# Altium PCB ZYNQ-HS-DEV-PCB.PcbDoc (part 7 of 10)
Units mm, origin at the board's own origin, x right, y up, seen from the top; angles counter-clockwise.
Board outline 125.25 x 111 mm, 10 copper layers (S1 (SIG), S2 (GND), S3 (SIG), S4 (GND), S5 (PWR), S6 (SIG), S7 (GND), S8 (SIG), S9 (GND), S10 (SIG)), stack 1.597 mm thick; 539 components, 408 nets, 2443 pads, 876 vias.
Unrouted connection lines stored in the file: 1310.
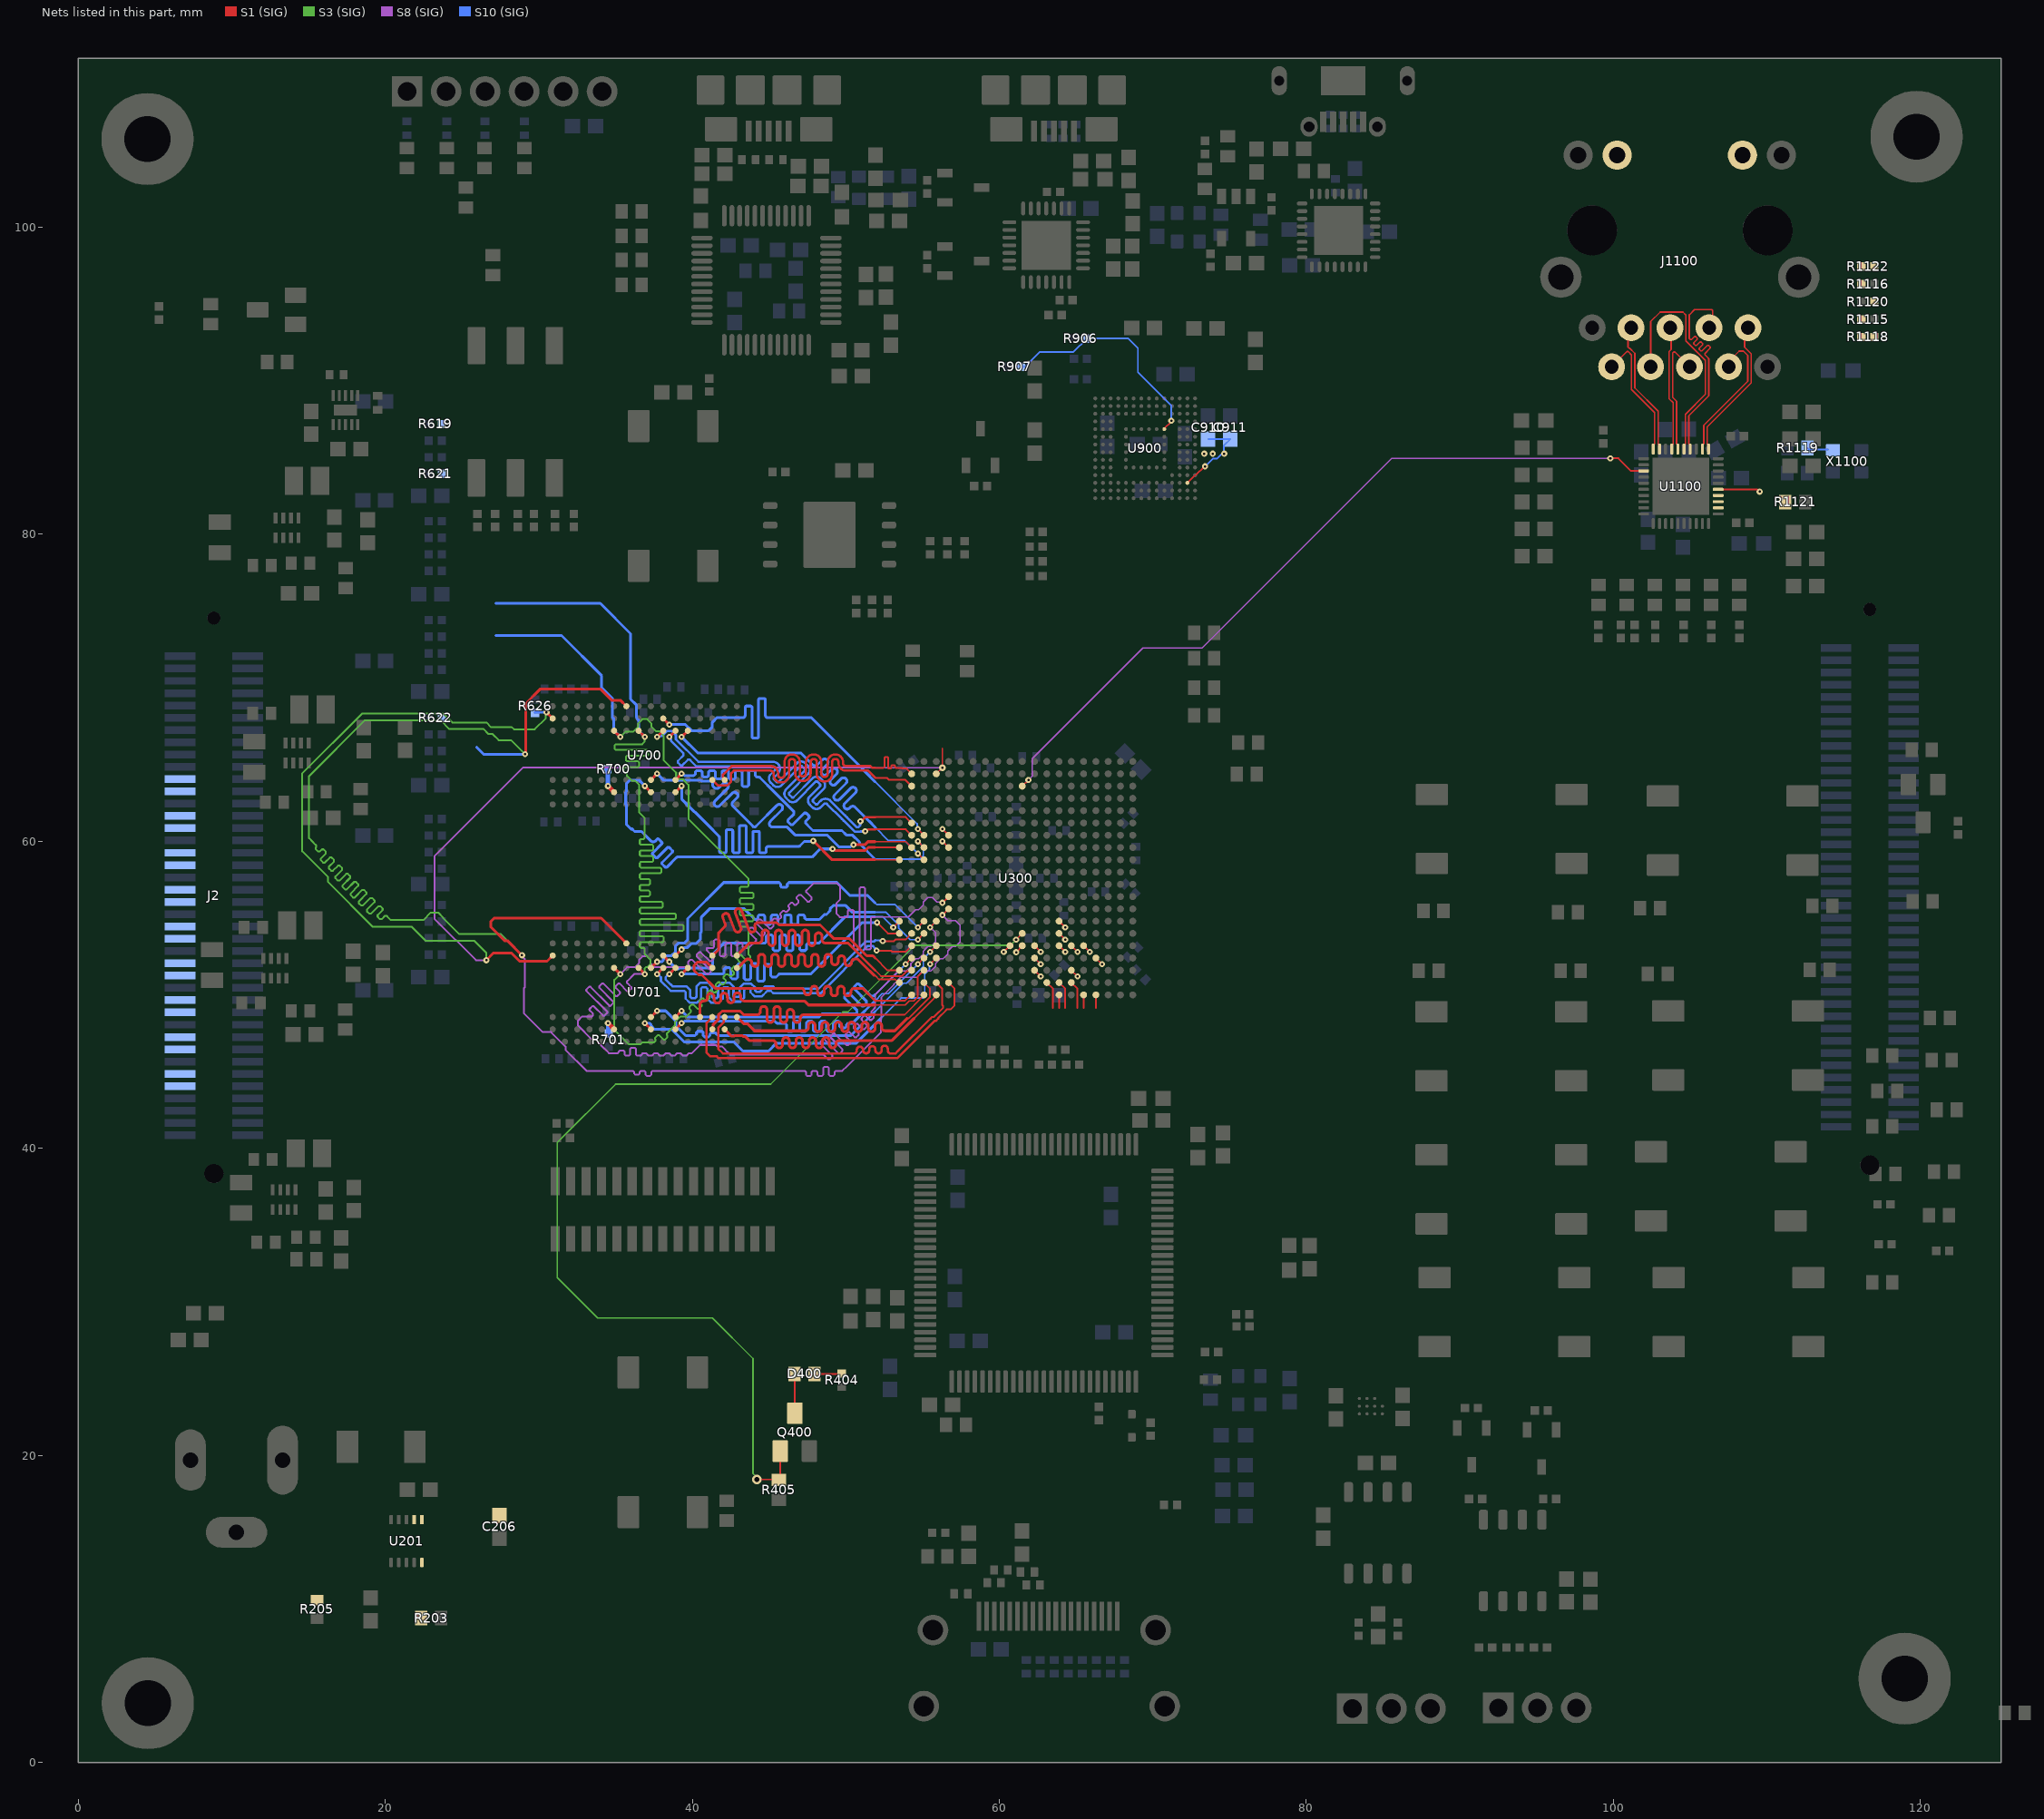
[diagram p11: the nets of this part, all layers, seen from the top]

## Via types
v1: diameter 0.4, hole 0.15, S1 (SIG) to S10 (SIG), tented both sides, 746 vias
v2: diameter 0.5, hole 0.25, S1 (SIG) to S10 (SIG), tented both sides, 108 vias
v3: diameter 0.5, hole 0.2, S1 (SIG) to S10 (SIG), tented both sides, 11 vias
v4: diameter 0.6, hole 0.3, S1 (SIG) to S10 (SIG), tented both sides, 10 vias
v5: diameter 0.45, hole 0.15, S1 (SIG) to S10 (SIG), tented both sides, 1 vias

## Nets (pads, with @x,y where several pads share a name; then routed paths per layer and width w, separated by ;. In a path a pad name is that pad's centre, name@x,y a point inside that pad or via, vN(x,y) a via of type N, cw(c..) or ccw(c..) an arc to the next point about the centre after c; other vN are vias at no path point) (continued)
DDR_DQ10: U300.G3 U700.G2 | length 27.5
  S1 (SIG) w0.11: v1(54.688,60.795) U300.G3@55.088,60.395
  S1 (SIG) w0.18: U700.G2@38.1,68 v1(38.5,67.6)
  S10 (SIG) w0.11: 51.9,63.88 54.646,61.135 54.646,60.837 v1(54.688,60.795)
  S10 (SIG) w0.18: v1(38.5,67.6) 39.548,67.6 39.938,67.21 41.062,67.21 41.3,67.448 41.3,67.752 41.598,68.05 43.175,68.05 43.265,68.05 ccw(c43.265,68.23) 43.445,68.23 43.445,68.723 cw(c43.532,68.723) 43.532,68.81 43.792,68.81 cw(c43.792,68.723) 43.879,68.723 43.879,66.817 ccw(c43.966,66.817) 43.966,66.73 44.226,66.73 ccw(c44.226,66.817) 44.313,66.817 44.313,69.217 cw(c44.4,69.217) 44.4,69.303 44.66,69.303 cw(c44.66,69.217) 44.747,69.217 44.747,68.23 ccw(c44.927,68.23) 44.927,68.05 47.575,68.05 47.75,68.05 51.228,64.572 51.228,64.553 51.9,63.88
DDR_DQ11: U300.H3 U700.F7 | length 27.4
  S1 (SIG) w0.11: v1(54.688,59.995) U300.H3@55.088,59.595
  S1 (SIG) w0.18: U700.F7@38.9,64 v1(39.3,64.4)
  S10 (SIG) w0.11: 51.9,58.84 54.835,58.84 55.043,59.048 55.043,59.64 v1(54.688,59.995)
  S10 (SIG) w0.18: v1(39.3,64.4) 39.36,64.4 39.49,64.27 40,64.27 40.09,64.27 40.195,64.375 40.195,64.523 40.282,64.61 40.543,64.61 40.629,64.523 40.629,64.282 40.716,64.195 40.977,64.195 41.063,64.282 41.063,64.523 41.15,64.61 41.411,64.61 41.497,64.523 41.497,64.15 41.584,64.063 41.845,64.063 41.931,64.15 41.931,64.523 42.018,64.61 42.279,64.61 42.365,64.523 42.365,64.123 42.452,64.036 42.713,64.036 42.799,64.123 42.799,64.523 42.886,64.61 43.147,64.61 43.233,64.523 43.233,63.652 43.32,63.565 43.581,63.565 43.667,63.652 43.667,64.523 43.754,64.61 44.015,64.61 44.101,64.523 44.101,64.28 44.207,64.175 44.375,64.175 44.481,64.069 44.693,63.857 45.023,63.527 45.086,63.464 46.621,61.929 46.621,61.78 46.23,61.389 46.23,61.266 46.414,61.082 46.537,61.082 47.29,61.836 47.413,61.836 47.597,61.652 47.597,61.529 47.384,61.315 47.384,61.166 47.643,60.907 47.707,60.843 47.855,60.695 49.744,60.695 50.024,60.415 50.412,60.415 50.89,59.937 50.89,59.85 51.9,58.84
DDR_DQ12: U300.J3 U700.E3 | length 27.4
  S1 (SIG) w0.11: v1(54.688,59.195) U300.J3@55.088,58.795
  S1 (SIG) w0.18: v1(39.3,66.8) U700.E3@39.7,67.2
  S10 (SIG) w0.11: 51.9,60.923 52.778,60.045 53.837,60.045 v1(54.688,59.195)
  S10 (SIG) w0.18: v1(39.3,66.8) 40.35,65.75 41.348,65.75 46.905,65.75 47.073,65.75 47.777,65.046 47.841,64.982 ccw(c47.994,65.136) 48.148,64.982 48.469,65.303 cw(c48.622,65.15) 48.776,65.303 cw(c48.622,65.15) 48.776,64.997 48.454,64.675 ccw(c48.608,64.522) 48.454,64.369 ccw(c48.608,64.522) 48.761,64.369 49.082,64.69 cw(c49.236,64.536) 49.389,64.69 cw(c49.236,64.536) 49.389,64.383 49.033,64.027 ccw(c49.187,63.873) 49.033,63.72 ccw(c49.187,63.873) 49.34,63.72 49.696,64.076 cw(c49.85,63.922) 50.003,64.076 cw(c49.85,63.922) 50.003,63.769 49.271,63.037 ; 49.271,63.037 ccw(c49.424,62.883) 49.271,62.73 ccw(c49.424,62.883) 49.578,62.73 50.31,63.462 cw(c50.463,63.309) 50.617,63.462 cw(c50.463,63.309) 50.617,63.155 49.931,62.47 ccw(c50.085,62.316) 49.931,62.163 ccw(c50.085,62.316) 50.238,62.163 50.296,62.22 cw(c50.449,62.067) 50.603,62.22 51.46,61.363 51.524,61.299 51.9,60.923
DDR_DQ13: U300.H2 U700.H7 | length 26.6
  S1 (SIG) w0.11: 51.9,59.975 53.908,59.975 U300.H2@54.288,59.595
  S1 (SIG) w0.18: U700.H7@37.3,64 v1(37.7,64.4) ; v1(50.5,59.775) 51.238,59.775 51.438,59.975 51.9,59.975
  S10 (SIG) w0.18: v1(37.7,64.4) 38.11,63.99 40.525,63.99 40.6,63.915 40.642,63.915 41.204,63.915 41.315,63.804 41.315,63.61 41.427,63.498 ccw(c41.58,63.652) 41.733,63.498 41.977,63.742 cw(c42.13,63.588) 42.284,63.742 cw(c42.13,63.588) 42.284,63.435 41.479,62.63 ccw(c41.632,62.476) 41.479,62.323 ccw(c41.632,62.476) 41.786,62.323 42.602,63.139 cw(c42.756,62.986) 42.909,63.139 cw(c42.756,62.986) 42.909,62.833 42.654,62.578 ccw(c42.808,62.424) 42.654,62.271 43.099,61.826 43.163,61.762 43.829,61.096 44,60.925 44.002,60.925 ccw(c44.002,61.142) 44.155,60.989 45.507,62.34 cw(c45.66,62.187) 45.814,62.34 cw(c45.66,62.187) 45.814,62.033 45.076,61.295 ccw(c45.229,61.142) 45.229,60.925 46.175,60.925 46.685,60.415 48.762,60.415 49.542,59.635 50.3,59.635 50.44,59.775 v1(50.5,59.775)
DDR_DQ14: U300.H1 U700.H8 | length 27.8
  S1 (SIG) w0.11: 51.9,59.595 U300.H1@53.488,59.595
  S1 (SIG) w0.18: v1(36.9,63.6) U700.H8@37.3,63.2 ; v1(49.125,59.5) 49.185,59.5 49.3,59.385 51.244,59.385 51.454,59.595 51.9,59.595
  S10 (SIG) w0.18: v1(36.9,63.6) 36.51,63.99 35.938,63.99 35.71,63.762 35.71,63.229 35.66,63.179 35.66,62.421 35.71,62.371 35.71,61.09 36,60.8 36.075,60.8 36.234,60.641 36.691,60.641 36.754,60.577 37.321,60.01 ccw(c37.448,60.138) 37.575,60.01 ; 37.575,60.01 37.696,60.131 cw(c37.758,60.07) 37.819,60.131 38.003,59.947 cw(c37.942,59.886) 38.003,59.824 37.424,59.245 ccw(c37.486,59.184) 37.424,59.123 37.608,58.939 ccw(c37.67,59) 37.731,58.939 38.38,59.587 cw(c38.441,59.526) 38.503,59.587 38.687,59.403 cw(c38.626,59.342) 38.687,59.28 38.038,58.632 ccw(c38.099,58.57) 38.038,58.509 38.222,58.325 ccw(c38.284,58.386) 38.345,58.325 38.944,58.924 cw(c39.07,58.796) 39.057,58.975 39.184,58.975 47.797,58.975 48.322,59.5 v1(49.125,59.5)
DDR_DQ15: U300.J1 U700.F8 | length 27.4
  S1 (SIG) w0.11: 51.9,58.795 U300.J1@53.488,58.795
  S1 (SIG) w0.18: U700.F8@38.9,63.2 v1(39.3,63.6) ; v1(47.875,60.025) 49.105,58.795 51.9,58.795
  S10 (SIG) w0.18: v1(39.3,63.6) 39.3,62.759 41,61.059 41.714,60.345 cw(c41.587,60.217) 41.767,60.217 41.767,59.342 ccw(c41.854,59.342) 41.854,59.255 42.114,59.255 ccw(c42.114,59.342) 42.201,59.342 42.201,60.667 cw(c42.288,60.667) 42.288,60.754 42.548,60.754 cw(c42.548,60.667) 42.635,60.667 42.635,59.342 ccw(c42.722,59.342) 42.722,59.255 42.982,59.255 ccw(c42.982,59.342) 43.069,59.342 43.069,60.939 cw(c43.156,60.939) 43.156,61.026 43.416,61.026 cw(c43.416,60.939) 43.503,60.939 43.503,59.342 ccw(c43.59,59.342) 43.59,59.255 43.85,59.255 ccw(c43.85,59.342) 43.937,59.342 43.937,60.558 cw(c44.024,60.558) 44.024,60.645 44.284,60.645 cw(c44.284,60.558) 44.371,60.558 44.371,59.342 ccw(c44.458,59.342) 44.458,59.255 44.718,59.255 ccw(c44.718,59.342) 44.805,59.342 44.805,59.495 cw(c44.985,59.495) 44.985,59.675 45.075,59.675 46.973,59.675 47.086,59.787 47.288,59.99 47.84,59.99 v1(47.875,60.025)
DDR_DQ16: U300.P1 U701.G2 | length 23.4
  S1 (SIG) w0.11: v1(53.088,54.395) U300.P1@53.488,54.795
  S1 (SIG) w0.18: U701.G2@38.1,52.55 v1(38.5,52.15)
  S10 (SIG) w0.11: 51.9,55.09 52.392,55.09 v1(53.088,54.395)
  S10 (SIG) w0.18: v1(38.5,52.15) 38.95,51.7 39.099,51.7 39.138,51.74 41.09,51.74 41.31,51.96 41.31,52.629 42.041,53.36 44.625,53.36 44.715,53.36 44.82,53.465 44.82,53.806 44.907,53.893 45.168,53.893 45.254,53.806 45.254,52.949 45.341,52.862 45.602,52.862 45.688,52.949 45.688,53.806 45.775,53.893 46.036,53.893 46.122,53.806 46.122,52.949 46.209,52.862 46.47,52.862 46.556,52.949 46.556,53.806 46.643,53.893 46.904,53.893 46.99,53.806 46.99,52.967 47.077,52.88 47.338,52.88 47.424,52.967 47.424,53.255 47.53,53.36 48.175,53.36 48.237,53.36 49.967,55.09 51.9,55.09
DDR_DQ17: U300.P3 U701.H3 | length 22.9
  S1 (SIG) w0.11: v1(54.688,54.395) U300.P3@55.088,54.795
  S1 (SIG) w0.18: U701.H3@37.3,51.75 v1(37.7,52.15)
  S10 (SIG) w0.11: 51.9,55.992 52.016,55.876 53.207,55.876 v1(54.688,54.395)
  S10 (SIG) w0.18: v1(37.7,52.15) 38.005,52.15 38.11,52.256 38.11,52.312 38.348,52.55 38.652,52.55 38.89,52.788 38.89,53.17 39.08,53.36 39.462,53.36 39.69,53.588 39.69,54.965 42.039,57.314 45.117,57.314 45.641,57.314 45.746,57.209 45.746,57.079 45.833,56.992 46.093,56.992 46.18,57.079 46.18,57.209 46.286,57.314 47.875,57.314 49.413,57.314 50.253,56.475 51.417,56.475 51.9,55.992
DDR_DQ18: U300.R3 U701.F2 | length 23.8
  S1 (SIG) w0.11: v1(54.688,53.595) U300.R3@55.088,53.995
  S1 (SIG) w0.18: U701.F2@38.9,52.55 v1(39.3,52.95)
  S10 (SIG) w0.11: 51.9,55.37 52.614,55.37 53.443,54.542 53.443,54.338 54.186,53.595 v1(54.688,53.595)
  S10 (SIG) w0.18: v1(39.3,52.95) 39.36,52.95 39.49,53.08 39.678,53.08 39.938,53.34 40.242,53.34 40.51,53.608 40.51,54.016 40.59,54.096 40.59,55.065 41.15,55.625 43.352,55.625 44.075,54.902 44.165,54.902 44.27,55.007 44.27,55.124 44.357,55.21 44.618,55.21 44.704,55.124 44.704,54.669 44.791,54.582 45.052,54.582 45.138,54.669 45.138,55.124 45.225,55.21 45.486,55.21 45.572,55.124 45.572,54.669 45.659,54.582 45.92,54.582 46.006,54.669 46.006,55.124 46.093,55.21 46.354,55.21 46.44,55.124 46.44,54.669 46.527,54.582 46.788,54.582 46.874,54.669 46.874,55.124 46.961,55.21 47.222,55.21 47.308,55.124 47.308,55.007 47.414,54.902 47.823,54.902 48.27,54.902 48.603,55.235 48.737,55.235 48.965,55.463 48.965,55.597 49.183,55.815 49.983,55.815 50.428,55.37 51.9,55.37
DDR_DQ19: U300.R1 U701.E3 | length 23
  S1 (SIG) w0.11: v1(52.025,54.7) 52.73,53.995 U300.R1@53.488,53.995
  S1 (SIG) w0.18: v1(39.3,51.35) U701.E3@39.7,51.75
  S10 (SIG) w0.11: v1@51.9,54.7 v1(52.025,54.7)
  S10 (SIG) w0.18: v1(39.3,51.35) 41.875,51.35 41.965,51.35 42.07,51.455 42.07,51.673 42.157,51.76 42.418,51.76 42.504,51.673 42.504,51.124 42.591,51.037 42.852,51.037 42.938,51.124 42.938,51.937 43.025,52.024 43.286,52.024 43.372,51.937 43.372,51.07 43.459,50.984 43.72,50.984 43.806,51.07 43.806,51.937 43.893,52.024 44.154,52.024 44.24,51.937 44.24,50.962 44.327,50.875 44.588,50.875 44.674,50.962 44.674,51.892 44.761,51.979 45.022,51.979 45.108,51.892 45.108,51.245 45.195,51.158 45.456,51.158 45.542,51.245 45.648,51.35 47.702,51.35 48.451,52.1 51.052,54.7 v1@51.9,54.7
DDR_DQ20: U300.T4 U701.H7 | length 23
  S1 (SIG) w0.11: v1(55.488,52.795) U300.T4@55.888,53.195
  S1 (SIG) w0.18: U701.H7@37.3,48.55 v1(37.7,48.95)
  S10 (SIG) w0.11: 51.9,48.909 53.741,50.75 53.945,50.75 55.043,51.848 55.043,52.35 v1(55.488,52.795)
  S10 (SIG) w0.18: v1(37.7,48.95) 38.252,48.95 38.91,48.292 38.91,47.988 39.563,47.335 40.075,47.335 40.165,47.335 40.27,47.44 40.27,47.536 40.357,47.622 40.618,47.622 40.704,47.536 40.704,47.335 40.791,47.248 41.052,47.248 41.138,47.335 41.138,47.44 41.225,47.527 41.486,47.527 41.572,47.44 41.678,47.335 42.7,47.335 50.326,47.335 51.9,48.909
DDR_DQ21: U300.U4 U701.H8 | length 23.9
  S1 (SIG) w0.11: v1(55.488,51.995) U300.U4@55.888,52.395
  S1 (SIG) w0.18: v1(36.9,48.15) U701.H8@37.3,47.75
  S10 (SIG) w0.11: 52.275,48.45 53.61,49.785 55.004,49.785 55.133,49.913 55.133,51.342 55.446,51.655 55.446,51.953 v1(55.488,51.995)
  S10 (SIG) w0.18: v1(36.9,48.15) 37.205,48.15 37.31,48.044 37.31,47.988 37.538,47.76 38.642,47.76 39.462,46.94 42.683,46.94 43.288,46.335 44.96,46.335 45.475,46.85 50.675,46.85 52.275,48.45
DDR_DQ22: U300.U2 U701.F7 | length 22.2
  S1 (SIG) w0.11: v1(53.888,51.995) U300.U2@54.288,52.395
  S1 (SIG) w0.18: U701.F7@38.9,48.55 v1(39.3,48.95)
  S10 (SIG) w0.11: 51.9,50.007 v1(53.888,51.995)
  S10 (SIG) w0.18: v1(39.3,48.95) 39.69,48.56 48.267,48.56 48.473,48.766 50.659,48.766 50.723,48.83 50.723,48.979 49.924,49.778 49.924,49.901 50.108,50.085 50.23,50.085 51.043,49.273 51.165,49.273 51.35,49.457 51.35,49.579 50.537,50.392 50.537,50.514 50.722,50.698 50.844,50.698 51.643,49.899 51.792,49.899 51.9,50.007
DDR_DQ23: U300.U3 U701.F8 | length 23.1
  S1 (SIG) w0.11: v1(54.688,51.995) U300.U3@55.088,52.395
  S1 (SIG) w0.18: U701.F8@38.9,47.75 v1(39.3,48.15)
  S10 (SIG) w0.11: 51.9,49.611 52.361,50.072 52.765,50.072 v1(54.688,51.995)
  S10 (SIG) w0.18: v1(39.3,48.15) 39.36,48.15 39.49,48.28 45.373,48.28 45.503,48.15 46.027,48.15 46.132,48.045 46.132,47.702 46.219,47.615 46.479,47.615 46.566,47.702 46.566,48.193 46.653,48.28 46.913,48.28 47,48.193 47,47.702 47.087,47.615 47.347,47.615 47.434,47.702 47.434,48.193 47.521,48.28 47.781,48.28 47.868,48.193 47.868,47.702 47.955,47.615 48.215,47.615 48.302,47.702 48.302,48.193 48.389,48.28 48.649,48.28 48.736,48.193 48.736,47.702 48.823,47.615 49.083,47.615 49.17,47.702 49.17,48.193 49.257,48.28 49.517,48.28 49.604,48.193 49.604,47.937 49.691,47.85 49.951,47.85 50.038,47.937 50.038,48.045 50.143,48.15 50.439,48.15 50.641,48.352 51.9,49.611
DDR_DQ24: U300.V1 U701.C2 | length 19.9
  S1 (SIG) w0.11: 51.9,52.4 52.705,51.595 U300.V1@53.488,51.595
  S1 (SIG) w0.18: U701.C2@41.3,52.55 41.71,52.96 41.71,54.035 41.942,54.267 42.081,54.405 ccw(c41.927,54.559) 42.13,54.636 41.986,55.012 cw(c42.188,55.09) 42.111,55.293 ; 42.111,55.293 cw(c42.188,55.09) 42.391,55.168 42.752,54.224 ccw(c42.955,54.302) 43.033,54.099 ccw(c42.955,54.302) 43.158,54.38 42.796,55.323 cw(c42.999,55.401) 42.921,55.603 cw(c42.999,55.401) 43.201,55.478 43.683,54.222 ccw(c43.886,54.299) 44.088,54.377 44.077,54.405 cw(c44.28,54.483) 44.28,54.7 45.499,54.7 45.649,54.55 48.323,54.55 49.218,53.655 50.243,53.655 51.358,52.54 51.76,52.54 51.9,52.4
DDR_DQ25: U300.Y3 U701.C8 | length 19.9
  S1 (SIG) w0.11: 51.9,48.692 53.819,48.692 55.088,49.96 U300.Y3@55.088,49.995
  S1 (SIG) w0.18: U701.C8@41.3,47.75 41.342,47.792 41.342,48.041 41.69,48.388 41.69,48.692 41.938,48.94 43.111,48.94 43.36,48.692 44.12,48.692 44.21,48.692 ccw(c44.21,48.909) 44.427,48.909 44.427,49.021 cw(c44.644,49.021) 44.861,49.021 44.861,48.411 ccw(c45.078,48.411) 45.295,48.411 45.295,49.021 cw(c45.512,49.021) 45.729,49.021 45.729,48.411 ccw(c45.946,48.411) 46.163,48.411 46.163,48.838 cw(c46.38,48.838) 46.597,48.838 46.597,48.411 ccw(c46.814,48.411) 47.031,48.411 47.031,48.475 cw(c47.248,48.475) 47.248,48.692 47.563,48.692 51.9,48.692
DDR_DQ26: U300.W1 U701.A3 | length 20.1
  S1 (SIG) w0.11: 51.834,51.28 51.87,51.28 51.9,51.249 52.145,51.005 53.205,51.005 53.415,50.795 U300.W1@53.488,50.795
  S1 (SIG) w0.18: U701.A3@42.9,51.75 42.95,51.75 43.225,52.026 43.525,52.325 43.641,52.325 cw(c43.641,52.108) 43.858,52.108 43.858,52.063 ccw(c44.075,52.063) 44.292,52.063 44.292,52.425 cw(c44.509,52.425) 44.726,52.425 44.726,52.063 ccw(c44.943,52.063) 45.16,52.063 45.16,52.425 cw(c45.377,52.425) 45.594,52.425 45.594,52.063 ccw(c45.811,52.063) 46.028,52.063 46.028,52.425 cw(c46.245,52.425) 46.462,52.425 46.462,52.063 ccw(c46.679,52.063) 46.896,52.063 46.896,52.425 cw(c47.113,52.425) 47.33,52.425 47.33,52.063 ccw(c47.547,52.063) 47.764,52.063 47.764,52.425 cw(c47.981,52.425) 48.198,52.425 48.198,52.063 ccw(c48.415,52.063) 48.632,52.063 48.632,52.425 cw(c48.849,52.425) 49.066,52.425 49.066,52.166 ccw(c49.283,52.166) 49.5,52.166 49.5,52.325 cw(c49.717,52.325) 49.934,52.325 49.934,52.108 ccw(c50.151,52.108) 50.368,52.108 cw(c50.585,52.108) 50.585,52.325 50.775,52.325 51.239,51.861 51.82,51.28 51.834,51.28 51.849,51.266 51.88,51.266
DDR_DQ27: U300.Y4 U701.B8 | length 20
  S1 (SIG) w0.11: 54.427,48.45 55.836,49.859 55.836,49.943 U300.Y4@55.888,49.995
  S1 (SIG) w0.18: U701.B8@42.1,47.75 42.55,47.3 42.699,47.3 42.738,47.34 43.258,47.34 43.328,47.271 43.456,47.271 43.702,47.025 44.7,47.025 45.224,47.025 cw(c45.224,46.808) 45.441,46.808 45.441,46.755 ccw(c45.658,46.755) 45.875,46.755 45.875,47.004 cw(c46.092,47.004) 46.309,47.004 46.309,46.755 ccw(c46.526,46.755) 46.743,46.755 46.743,47.004 cw(c46.96,47.004) 47.177,47.004 47.177,46.755 ccw(c47.394,46.755) 47.611,46.755 47.611,47.004 cw(c47.828,47.004) 48.045,47.004 48.045,46.755 ccw(c48.262,46.755) 48.479,46.755 48.479,47.004 cw(c48.696,47.004) 48.913,47.004 48.913,46.755 ccw(c49.13,46.755) 49.347,46.755 49.347,46.808 cw(c49.564,46.808) 49.564,47.025 50.305,47.025 53.002,47.025 54.427,48.45
DDR_DQ28: U300.Y2 U701.C3 | length 20.1
  S1 (SIG) w0.11: 51.9,49.615 53.837,49.615 54.217,49.995 U300.Y2@54.288,49.995
  S1 (SIG) w0.18: U701.C3@41.3,51.75 40.91,52.14 40.338,52.14 40.11,51.912 40.11,51.588 40.398,51.3 40.614,51.3 41.489,50.425 46.049,50.425 47.071,50.425 cw(c47.071,50.208) 47.288,50.208 ccw(c47.505,50.208) 47.722,50.208 47.722,50.344 cw(c47.939,50.344) 48.156,50.344 48.156,50.151 ccw(c48.373,50.151) 48.59,50.151 48.59,50.344 cw(c48.807,50.344) 49.024,50.344 49.024,50.146 ccw(c49.241,50.146) 49.458,50.146 49.458,50.344 cw(c49.675,50.344) 49.892,50.344 49.892,50.146 ccw(c50.109,50.146) 50.326,50.146 50.326,50.208 cw(c50.543,50.208) 50.543,50.425 50.633,50.425 51.09,50.425 51.9,49.615
DDR_DQ29: U300.W3 U701.A7 | length 20.1
  S1 (SIG) w0.11: 53.981,48.45 54.08,48.45 55.468,49.837 55.468,50.415 U300.W3@55.088,50.795
  S1 (SIG) w0.18: U701.A7@42.9,48.55 43.335,48.115 43.587,48.115 44.052,47.65 47.25,47.65 47.34,47.65 ccw(c47.34,47.867) 47.557,47.867 47.557,48.003 cw(c47.774,48.003) 47.991,48.003 47.991,47.81 ccw(c48.208,47.81) 48.425,47.81 48.425,48.003 cw(c48.642,48.003) 48.859,48.003 48.859,47.81 ccw(c49.076,47.81) 49.293,47.81 49.293,48.003 cw(c49.51,48.003) 49.727,48.003 49.727,47.81 ccw(c49.944,47.81) 50.161,47.81 50.161,48.003 cw(c50.378,48.003) 50.595,48.003 50.595,47.81 ccw(c50.812,47.81) 51.029,47.81 51.029,48.003 cw(c51.246,48.003) 51.463,48.003 51.463,47.81 ccw(c51.68,47.81) 51.897,47.81 51.897,47.977 cw(c52.114,47.977) 52.331,47.977 52.331,47.867 ccw(c52.548,47.867) 52.548,47.65 53.181,47.65 53.45,47.919 53.981,48.45
DDR_DQ30: U300.V2 U701.A2 | length 20.4
  S1 (SIG) w0.11: 51.9,51.596 52.281,51.215 53.645,51.215 53.973,51.543 54.236,51.543 U300.V2@54.288,51.595
  S1 (SIG) w0.18: U701.A2@42.9,52.55 43.725,53.375 44.225,53.375 44.315,53.375 ccw(c44.315,53.592) 44.532,53.592 44.532,54.002 cw(c44.749,54.002) 44.966,54.002 44.966,53.416 ccw(c45.183,53.416) 45.4,53.416 45.4,54.002 cw(c45.617,54.002) 45.834,54.002 45.834,53.416 ccw(c46.051,53.416) 46.268,53.416 46.268,54.002 cw(c46.485,54.002) 46.702,54.002 46.702,53.416 ccw(c46.919,53.416) 47.136,53.416 47.136,54.002 cw(c47.353,54.002) 47.57,54.002 47.57,53.416 ccw(c47.787,53.416) 48.004,53.416 48.004,53.822 cw(c48.221,53.822) 48.438,53.822 48.438,53.592 ccw(c48.655,53.592) 48.655,53.375 49.203,53.375 50.121,53.375 51.9,51.596
DDR_DQ31: U300.V3 U701.D7 | length 19.8
  S1 (SIG) w0.11: 51.9,49.335 53.854,49.335 54.119,49.6 54.43,49.6 54.668,49.837 54.668,51.175 U300.V3@55.088,51.595
  S1 (SIG) w0.18: U701.D7@40.5,48.55 40.5,49.45 40.569,49.519 40.65,49.6 40.762,49.6 ccw(c40.762,49.817) 40.978,49.821 40.978,49.87 cw(c41.194,49.874) 41.19,50.091 cw(c41.194,49.874) 41.411,49.878 41.415,49.671 ccw(c41.632,49.675) 41.637,49.458 ccw(c41.632,49.675) 41.849,49.679 41.845,49.887 cw(c42.062,49.891) 42.058,50.108 cw(c42.062,49.891) 42.279,49.895 42.283,49.688 ccw(c42.5,49.692) 42.504,49.475 ccw(c42.5,49.692) 42.717,49.696 42.713,49.904 cw(c42.93,49.908) 42.926,50.125 cw(c42.93,49.908) 43.147,49.912 43.149,49.813 ccw(c43.366,49.817) 43.366,49.6 43.824,49.6 47.3,49.6 47.565,49.335 51.9,49.335
DDR_DQS0_N: U300.B2 U700.B7 | length 21.4
  S1 (SIG) w0.121: 51.9,64.78 52.403,64.78 ccw(c52.403,64.901) 52.524,64.901 52.524,65.431 cw(c52.568,65.431) 52.568,65.475 52.701,65.475 cw(c52.701,65.431) 52.745,65.431 52.745,64.805 ccw(c52.789,64.805) 52.789,64.761 52.922,64.761 ccw(c52.922,64.805) 52.966,64.805 52.966,64.906 cw(c53.01,64.906) 53.01,64.95 53.143,64.95 cw(c53.143,64.906) 53.187,64.906 53.187,64.901 ccw(c53.308,64.901) 53.308,64.78 53.529,64.78 53.647,64.78 53.678,64.75 53.932,64.75 U300.B2@54.288,64.395
  S1 (SIG) w0.15: U700.B7@42.1,64 42.1,64.068 41.987,64.181 41.987,64.337 42.55,64.9 42.751,64.9 45.088,64.9 cw(c45.088,64.398) 45.59,64.398 45.59,64.333 ccw(c45.792,64.333) 45.994,64.333 45.994,65.158 cw(c46.496,65.158) 46.998,65.158 46.998,64.427 ccw(c47.2,64.427) 47.402,64.427 47.402,65.158 cw(c47.904,65.158) 48.406,65.158 48.406,64.392 ccw(c48.608,64.392) 48.81,64.392 48.81,65.158 cw(c49.312,65.158) 49.814,65.158 49.814,65.102 ccw(c50.016,65.102) 50.016,64.9 51.41,64.9 51.595,64.9 51.714,64.78 51.9,64.78
DDR_DQS0_P: U300.C2 U700.C7 | length 21
  S1 (SIG) w0.121: 51.9,64.15 51.925,64.125 52.69,64.125 52.806,64.009 53.873,64.009 U300.C2@54.288,63.595
  S1 (SIG) w0.15: U700.C7@41.3,64 41.675,63.625 42.255,63.625 42.525,63.895 42.525,64.424 42.701,64.6 42.751,64.6 45.088,64.6 cw(c45.088,64.398) 45.29,64.398 45.29,64.333 ccw(c45.792,64.333) 46.294,64.333 46.294,65.158 cw(c46.496,65.158) 46.698,65.158 46.698,64.427 ccw(c47.2,64.427) 47.702,64.427 47.702,65.158 cw(c47.904,65.158) 48.106,65.158 48.106,64.392 ccw(c48.608,64.392) 49.11,64.392 49.11,65.158 cw(c49.312,65.158) 49.514,65.158 49.514,65.102 ccw(c50.016,65.102) 50.016,64.6 51.41,64.6 51.45,64.6 51.9,64.15
DDR_DQS1_N: U300.F2 U700.G3 | length 28.8
  S1 (SIG) w0.121: 51.9,61.58 53.902,61.58 U300.F2@54.288,61.195
  S1 (SIG) w0.15: v1(50.95,61.3) 50.99,61.3 51.271,61.58 51.9,61.58
  S1 (SIG) w0.18: v1(37.7,66.8) U700.G3@38.1,67.2
  S10 (SIG) w0.15: v1(37.7,66.8) 37.748,66.848 38.018,66.848 38.345,67.175 38.655,67.175 38.925,66.905 38.925,66.645 40.395,65.175 44.65,65.175 45.253,65.175 cw(c45.253,64.725) 45.571,64.407 45.314,64.15 ccw(c45.371,64.092) 45.314,64.035 45.485,63.864 ccw(c45.542,63.921) 45.599,63.864 46.867,65.131 46.875,65.131 cw(c47.092,64.818) 47.361,65.087 47.533,64.916 cw(c47.263,64.646) 47.533,64.377 46.31,63.155 ccw(c46.366,63.097) 46.309,63.04 46.481,62.868 ccw(c46.538,62.925) 46.595,62.868 47.862,64.135 47.871,64.135 cw(c48.087,63.822) 48.357,64.091 48.528,63.92 cw(c48.259,63.651) 48.528,63.382 47.859,62.712 ccw(c47.916,62.655) 47.859,62.598 48.03,62.426 ccw(c48.087,62.484) 48.144,62.426 48.354,62.636 cw(c48.672,62.317) 48.939,62.68 48.946,62.68 49.558,62.068 49.953,61.673 50.068,61.558 50.699,60.927 50.823,60.927 50.922,61.027 50.922,61.272 v1(50.95,61.3)
DDR_DQS1_P: U300.G2 U700.F3 | length 28.6
  S1 (SIG) w0.121: 51.9,60.78 53.902,60.78 U300.G2@54.288,60.395
  S1 (SIG) w0.15: v1(51.25,60.65) 51.318,60.65 51.448,60.78 51.9,60.78
  S1 (SIG) w0.18: v1(38.5,66.8) U700.F3@38.9,67.2
  S10 (SIG) w0.15: v1(38.5,66.8) 38.5,66.732 38.625,66.607 38.625,66.52 38.87,66.275 39.423,65.722 39.423,65.598 39.058,65.233 39.058,65.119 39.229,64.947 39.343,64.947 39.709,65.313 39.833,65.313 39.886,65.259 40.27,64.875 44.35,64.875 45.253,64.875 cw(c45.253,64.725) 45.359,64.619 45.058,64.318 45.058,64.309 ccw(c45.371,64.092) 45.102,63.822 45.273,63.652 ccw(c45.542,63.921) 45.812,63.652 47.034,64.874 ; 47.035,64.875 cw(c47.092,64.818) 47.149,64.875 47.32,64.704 cw(c47.263,64.646) 47.32,64.589 46.053,63.322 46.053,63.313 ccw(c46.366,63.097) 46.098,62.827 46.268,62.657 ccw(c46.538,62.925) 46.807,62.656 48.03,63.879 ; 48.03,63.879 cw(c48.087,63.822) 48.145,63.879 48.316,63.708 cw(c48.259,63.651) 48.316,63.594 47.647,62.924 ccw(c47.916,62.655) 47.647,62.385 47.817,62.215 ccw(c48.087,62.484) 48.356,62.214 48.566,62.423 cw(c48.672,62.317) 48.778,62.423 49.741,61.461 49.856,61.345 50.574,60.627 50.947,60.627 50.96,60.639 51.239,60.639 v1(51.25,60.65)
DDR_DQS2_N: U300.T2 U701.G3 | length 24.2
  S1 (SIG) w0.11: 53.888,52.795 U300.T2@54.288,53.195
  S1 (SIG) w0.121: v1(52,52.875) 52.941,52.875 53.022,52.795 53.888,52.795
  S1 (SIG) w0.18: v1(37.7,51.35) U701.G3@38.1,51.75
  S10 (SIG) w0.121: v1@51.9,52.975 v1(52,52.875)
  S10 (SIG) w0.15: v1(37.7,51.35) 37.737,51.35 37.95,51.137 37.95,50.889 38.589,50.25 38.607,50.25 39.474,50.25 39.562,50.162 39.562,49.748 39.818,49.492 40.309,49.492 40.566,49.748 40.566,50.405 40.646,50.486 40.889,50.486 40.97,50.405 40.97,49.748 41.226,49.492 41.717,49.492 41.974,49.748 41.974,50.405 42.054,50.486 42.297,50.486 42.378,50.405 42.378,49.814 42.634,49.558 43.125,49.558 43.382,49.814 43.382,50.338 43.462,50.419 43.705,50.419 43.786,50.338 43.786,50.162 44.042,49.906 44.533,49.906 44.79,50.162 44.877,50.25 45.116,50.25 45.266,50.1 48.349,50.1 51.433,53.184 51.739,53.184 51.9,53.023 v1@51.9,52.975
DDR_DQS2_P: U300.R2 U701.F3 | length 23.6
  S1 (SIG) w0.11: 53.888,53.595 U300.R2@54.288,53.995
  S1 (SIG) w0.121: v1(52.4,53.5) 53.134,53.5 53.229,53.595 53.888,53.595
  S1 (SIG) w0.18: v1(38.5,51.35) U701.F3@38.9,51.75
  S10 (SIG) w0.121: 51.9,53.546 52.354,53.546 v1(52.4,53.5)
  S10 (SIG) w0.15: v1(38.5,51.35) 38.463,51.35 38.25,51.137 38.25,51.013 38.607,50.656 38.713,50.55 39.598,50.55 39.862,50.286 39.862,49.872 39.942,49.792 40.185,49.792 40.266,49.872 40.266,50.529 40.522,50.786 41.013,50.786 41.27,50.529 41.27,49.872 41.35,49.792 41.593,49.792 41.674,49.872 41.674,50.529 41.93,50.786 42.421,50.786 42.678,50.529 42.678,49.938 42.758,49.858 43.001,49.858 43.082,49.938 43.082,50.462 43.338,50.719 43.829,50.719 44.086,50.462 44.086,50.286 44.166,50.206 44.409,50.206 44.49,50.286 44.753,50.55 44.829,50.55 45.116,50.55 45.24,50.55 45.39,50.4 48.225,50.4 51.309,53.484 51.838,53.484 51.9,53.546
DDR_DQS3_N: U300.W4 U701.B7 | length 21.9
  S1 (SIG) w0.121: 55.816,48.641 56.336,49.161 56.336,49.261 56.273,49.324 56.273,50.409 U300.W4@55.888,50.795
  S1 (SIG) w0.123: 55.507,48.45 55.618,48.561 55.736,48.561 55.816,48.641
  S1 (SIG) w0.15: U701.B7@42.1,48.55 42.052,48.502 42.052,48.232 41.675,47.855 41.675,46.488 41.988,46.175 50,46.175 50.507,46.175 ccw(c50.507,46.377) 50.709,46.385 50.708,46.409 cw(c50.91,46.418) 50.901,46.619 cw(c50.91,46.418) 51.112,46.426 51.114,46.377 ccw(c51.315,46.385) 51.324,46.183 ccw(c51.315,46.385) 51.517,46.394 51.515,46.443 cw(c51.717,46.451) 51.709,46.653 cw(c51.717,46.451) 51.919,46.46 51.922,46.377 ccw(c52.124,46.385) 52.133,46.183 ccw(c52.124,46.385) 52.326,46.394 52.323,46.476 cw(c52.524,46.485) 52.516,46.687 cw(c52.524,46.485) 52.726,46.493 52.731,46.369 ccw(c52.933,46.377) 52.933,46.175 53.232,46.175 53.413,46.357 55.507,48.45
DDR_DQS3_P: U300.W5 U701.C7 | length 21.9
  S1 (SIG) w0.121: 56.007,48.45 56.007,48.481 56.511,48.986 56.585,49.059 56.837,49.059 57.073,49.295 57.073,50.409 U300.W5@56.688,50.795
  S1 (SIG) w0.15: U701.C7@41.3,48.55 40.925,48.175 40.925,46.22 41.16,45.985 41.587,45.985 41.697,45.875 53.356,45.875 55.779,48.298 55.855,48.298 56.007,48.45
DDR_DRST_B: R626.2 U300.B4 U700.T2 U701.T2 | length 91.2
  S1 (SIG) w0.11: U300.B4@55.888,64.395 v5(56.288,64.795) 56.288,66.055
  S1 (SIG) w0.18: v1(26.575,52.25) 27.05,52.725 28.198,52.725 28.738,52.185 30.535,52.185 U701.T2@30.9,52.55 ; v1(30.5,68.4) U700.T2@30.9,68
  S3 (SIG) w0.119: v1(26.575,52.25) 26.575,52.725 25.781,53.519 22.616,53.519 21.701,54.434 19.181,54.434 16.247,57.368 16.247,57.688 14.587,59.348 14.587,64.427 18.483,68.323 23.774,68.323 24.355,67.742 26.585,67.742 26.896,67.431 28.24,67.431 28.38,67.29 29.724,67.29 30.455,68.021 30.455,68.355 v1(30.5,68.4)
  S8 (SIG) w0.1: 51.9,64.795 v5(56.288,64.795)
  S8 (SIG) w0.119: v1(26.575,52.25) 25.9,52.25 23.2,54.95 23.2,59.035 28.96,64.795 51.9,64.795
  S10 (SIG) w0.18: R626.2@29.75,68.375 29.775,68.4 v1(30.5,68.4)
DDR_ODT: R622.2 U300.N5 U700.K1 U701.K1 | length 120.5
  S1 (SIG) w0.11: v1(56.288,55.195) U300.N5@56.688,55.595
  S1 (SIG) w0.18: v1(28.9,52.575) 27.947,53.528 27.771,53.528 26.86,54.438 26.86,54.762 27.088,54.99 34.06,54.99 U701.K1@35.7,53.35 ; v1(29.1,65.675) 29.142,65.717 29.142,68.967 30.1,69.925 34.003,69.925 34.738,69.19 35.31,69.19 U700.K1@35.7,68.8
  S3 (SIG) w0.119: v1(28.9,52.575) 27.518,53.957 24.813,53.957 23.779,54.991 23.779,55.015 23.44,55.354 22.96,55.354 22.478,54.872 20.353,54.872 20.125,55.1 20.083,55.142 19.977,55.142 19.76,54.925 19.654,54.925 19.496,55.083 19.496,55.189 19.82,55.513 19.82,55.618 19.662,55.777 19.556,55.777 19.06,55.28 18.955,55.28 18.796,55.439 18.796,55.544 19.292,56.041 19.292,56.146 19.134,56.304 19.029,56.304 18.532,55.808 18.427,55.808 18.268,55.967 18.268,56.072 18.765,56.568 18.765,56.674 18.606,56.832 18.501,56.832 18.005,56.336 17.899,56.336 17.741,56.494 17.741,56.6 18.237,57.096 18.237,57.202 18.079,57.36 17.973,57.36 17.477,56.864 17.371,56.864 17.213,57.022 17.213,57.128 17.709,57.624 17.709,57.729 17.551,57.888 17.445,57.888 17.002,57.444 16.896,57.444 16.738,57.603 16.738,57.708 17.181,58.152 17.181,58.257 17.023,58.416 16.917,58.416 16.581,58.079 16.476,58.079 16.317,58.238 16.317,58.343 16.654,58.679 16.654,58.785 16.495,58.943 16.39,58.943 16.053,58.607 15.948,58.607 15.79,58.765 15.79,58.871 16.126,59.207 16.126,59.313 15.967,59.471 15.862,59.471 15.722,59.331 15.617,59.331 15.458,59.49 15.458,59.595 15.491,59.628 15.491,59.734 15.31,59.915 15.268,59.957 15.025,60.2 15.025,64.245 18.665,67.885 23.592,67.885 24.173,67.303 26.403,67.303 26.714,66.992 26.973,66.992 27.384,66.581 28.194,66.581 v1(29.1,65.675)
  S8 (SIG) w0.1: 52.291,48.45 52.3,48.46 52.3,48.537 52.31,48.546 52.31,49.844 53.138,50.672 53.138,50.705 53.577,51.145 54.615,51.145 55.015,51.545 55.533,51.545 55.839,51.851 55.839,52.041 56.145,52.347 56.335,52.347 56.64,52.652 56.64,52.842 56.944,53.146 57.134,53.146 57.438,53.45 57.438,54.54 57.137,54.84 56.642,54.84 v1(56.288,55.195)
  S8 (SIG) w0.119: v1(28.9,52.575) 28.9,52.499 29.085,52.314 29.085,50.476 29.021,50.413 29.021,48.81 30.26,47.571 30.787,47.571 31.74,46.618 31.74,46.401 33.103,45.038 33.675,45.038 36.127,45.038 36.202,44.964 36.202,44.877 36.277,44.802 36.501,44.802 36.575,44.877 36.575,44.964 36.65,45.038 36.874,45.038 36.948,44.964 36.948,44.794 37.023,44.719 37.247,44.719 37.322,44.794 37.322,44.964 37.396,45.038 47.323,45.038 47.398,44.964 47.398,44.794 47.472,44.719 47.696,44.719 47.771,44.794 47.771,44.964 47.846,45.038 48.069,45.038 48.144,44.964 48.144,44.794 48.219,44.719 48.443,44.719 48.517,44.794 48.517,45.231 48.592,45.306 48.816,45.306 48.89,45.231 48.89,44.794 48.965,44.719 49.189,44.719 49.264,44.794 49.264,44.964 49.338,45.038 49.763,45.038 50.07,45.345 52.291,47.566 52.291,48.45
  S10 (SIG) w0.18: 25.944,66.131 26.4,65.675 v1(29.1,65.675)
DDR_RAS_B: R619.2 U300.P4 U700.J3 U701.J3 | length 121.5
  S1 (SIG) w0.11: v1(55.488,54.395) U300.P4@55.888,54.795
  S1 (SIG) w0.18: U701.J3@36.5,51.75 v1(36.9,51.35) ; U700.J3@36.5,67.2 v1(36.9,66.8)
  S3 (SIG) w0.119: v1(36.9,51.35) 36.9,51.721 36.97,51.79 37.049,51.79 37.26,52.001 37.26,52.299 36.9,52.659 36.9,52.925 36.9,52.985 36.825,53.059 36.65,53.059 36.576,53.134 36.576,53.358 36.65,53.432 38.066,53.432 38.14,53.507 38.14,53.731 38.066,53.806 36.65,53.806 36.576,53.88 36.576,54.104 36.65,54.179 39.365,54.179 39.44,54.253 39.44,54.477 39.365,54.552 36.65,54.552 36.576,54.627 36.576,54.851 36.65,54.925 38.849,54.925 38.923,55 38.923,55.224 38.849,55.298 36.65,55.298 36.576,55.373 36.576,55.597 36.65,55.672 38.002,55.672 38.076,55.746 38.076,55.97 38.002,56.045 36.65,56.045 36.576,56.119 36.576,56.343 36.65,56.418 37.155,56.418 37.23,56.493 37.23,56.716 37.155,56.791 36.65,56.791 36.576,56.866 36.576,57.09 36.65,57.164 37.175,57.164 37.249,57.239 37.249,57.463 37.175,57.538 36.65,57.538 36.576,57.612 36.576,57.836 36.65,57.911 37.902,57.911 37.977,57.985 37.977,58.209 37.902,58.284 36.65,58.284 36.576,58.359 36.576,58.582 36.65,58.657 37.386,58.657 37.461,58.732 37.461,58.956 37.386,59.03 36.65,59.03 36.576,59.105 36.576,59.329 36.65,59.403 37.386,59.403 37.461,59.478 37.461,59.702 37.386,59.777 36.65,59.777 36.576,59.851 36.576,60.075 36.65,60.15 36.825,60.15 36.9,60.224 36.9,60.325 36.9,61.447 36.894,61.453 36.894,61.519 36.54,61.873 36.54,63.668 36.249,63.96 36.032,63.96 35.74,64.251 35.74,64.324 35.74,64.384 35.666,64.458 35.608,64.458 35.533,64.533 35.533,64.757 35.608,64.832 36.461,64.832 36.536,64.906 36.536,65.13 36.461,65.205 35.738,65.205 35.663,65.279 35.663,65.503 35.738,65.578 37.047,65.578 37.121,65.653 37.121,65.876 37.047,65.951 34.998,65.951 34.923,66.026 34.923,66.25 34.998,66.324 36.731,66.324 36.9,66.493 v1(36.9,66.8)
  S8 (SIG) w0.1: 51.9,49.15 51.91,49.16 51.91,50.01 52.738,50.838 52.738,50.871 53.411,51.545 53.933,51.545 54.238,51.85 54.238,52.04 54.543,52.345 54.733,52.345 55.038,52.65 55.038,52.84 55.343,53.146 55.533,53.146 55.838,53.45 55.838,54.045 v1(55.488,54.395)
  S8 (SIG) w0.119: v1(36.9,51.35) 36.575,51.35 36.208,51.35 35.77,50.912 ccw(c35.854,50.828) 35.77,50.744 36.018,50.496 cw(c35.965,50.443) 36.018,50.39 35.859,50.232 cw(c35.807,50.285) 35.754,50.232 35.267,50.718 ccw(c35.215,50.666) 35.162,50.718 35.004,50.56 ccw(c35.056,50.507) 35.004,50.455 35.272,50.186 cw(c35.219,50.133) 35.272,50.08 35.114,49.922 cw(c35.061,49.975) 35.008,49.922 34.212,50.718 ccw(c34.159,50.666) 34.106,50.718 33.948,50.56 ccw(c34.001,50.507) 33.948,50.455 34.843,49.559 cw(c34.791,49.506) 34.843,49.453 34.685,49.295 cw(c34.632,49.348) 34.58,49.295 33.365,50.51 ccw(c33.312,50.457) 33.259,50.51 33.101,50.351 ccw(c33.154,50.299) 33.101,50.246 34.434,48.913 cw(c34.382,48.86) 34.434,48.807 34.276,48.649 cw(c34.223,48.702) 34.17,48.649 33.576,49.243 ccw(c33.524,49.19) 33.471,49.243 33.312,49.085 ccw(c33.365,49.032) 33.312,48.979 33.49,48.801 cw(c33.406,48.717) 33.49,48.633 33.448,48.59 32.832,48.59 32.54,48.299 32.54,48.001 33.446,47.096 33.654,47.096 33.84,46.91 33.849,46.91 34.06,46.699 34.06,46.69 34.56,46.19 34.95,46.19 35.128,46.19 35.203,46.265 35.203,46.297 35.277,46.371 35.501,46.371 35.576,46.297 35.576,46.106 35.651,46.031 35.874,46.031 35.949,46.106 35.949,46.477 36.024,46.552 36.248,46.552 36.322,46.477 36.322,46.106 36.397,46.031 36.621,46.031 36.695,46.106 36.695,46.116 36.77,46.19 36.994,46.19 37.069,46.116 37.069,46.106 37.143,46.031 37.367,46.031 37.442,46.106 37.442,46.116 37.516,46.19 37.74,46.19 37.815,46.116 37.815,46.106 37.89,46.031 38.114,46.031 38.188,46.106 38.188,46.116 38.263,46.19 38.487,46.19 38.561,46.116 38.561,46.106 38.636,46.031 38.86,46.031 38.935,46.106 38.935,46.116 39.009,46.19 39.233,46.19 39.308,46.116 39.308,46.106 39.382,46.031 39.606,46.031 39.681,46.106 39.681,46.116 39.756,46.19 39.815,46.19 39.965,46.19 40.51,46.735 41.524,46.735 41.613,46.646 41.923,46.646 42.14,46.428 42.14,46.401 42.351,46.19 42.378,46.19 42.455,46.113 47.661,46.113 48.528,46.113 48.844,45.797 48.949,45.797 49.108,45.955 49.108,46.061 48.339,46.83 48.339,46.935 48.497,47.093 48.603,47.093 49.515,46.181 49.621,46.181 49.779,46.339 49.779,46.445 49.002,47.222 49.002,47.328 49.16,47.486 49.266,47.486 50.043,46.709 50.149,46.709 50.307,46.867 50.307,46.973 49.971,47.309 49.971,47.415 50.129,47.573 50.234,47.573 50.571,47.236 50.676,47.236 50.835,47.395 50.835,47.5 50.498,47.837 50.498,47.942 50.657,48.101 50.762,48.101 51.099,47.764 51.204,47.764 51.363,47.923 51.363,48.028 51.026,48.365 51.026,48.47 51.184,48.628 51.29,48.628 51.558,48.361 51.663,48.361 51.822,48.519 51.822,48.625 51.651,48.795 51.651,48.901 51.753,49.003 51.9,49.15
  S10 (SIG) w0.18: 27.2,75.5 33.969,75.5 ; 34,75.5 35.975,73.525 35.975,69.256 36.365,68.866 36.365,68.078 36.385,68.058 36.385,67.996 36.49,67.891 36.49,67.21 v1(36.9,66.8)
DDR_VRN: R625.1 U300.G5 | length 0.6
  S1 (SIG) w0.11: v1(56.288,60.795) U300.G5@56.688,60.395
DDR_VRP: R627.2 U300.H5 | length 0.6
  S1 (SIG) w0.11: v1(56.288,59.995) U300.H5@56.688,59.595
DDR_WE_B: R621.2 U300.M5 U700.L3 U701.L3 | length 116.4
  S1 (SIG) w0.11: v1(56.288,55.995) U300.M5@56.688,56.395
  S1 (SIG) w0.18: U701.L3@34.9,51.75 v1(35.3,51.35) ; U700.L3@34.9,67.2 v1(35.3,66.8)
  S3 (SIG) w0.119: v1(35.3,51.35) 34.915,50.965 34.915,47.716 35.86,46.771 36.442,46.771 36.613,46.771 36.751,46.91 37.51,46.91 37.584,46.984 37.584,47.09 37.574,47.1 37.574,47.206 37.733,47.364 37.838,47.364 38.114,47.088 38.22,47.088 38.378,47.246 38.378,47.352 38.347,47.383 38.347,47.488 38.86,48.001 38.86,48.218 39.232,48.59 39.615,48.59 39.908,48.883 39.908,48.988 39.798,49.099 39.798,49.204 39.956,49.362 40.062,49.362 40.334,49.091 40.439,49.091 40.597,49.249 40.597,49.354 40.458,49.494 40.458,49.599 40.616,49.758 40.722,49.758 40.861,49.618 40.967,49.618 41.125,49.777 41.125,49.882 40.986,50.022 40.986,50.127 41.144,50.286 41.25,50.286 41.389,50.146 41.495,50.146 41.653,50.304 41.653,50.41 41.514,50.549 41.514,50.655 41.672,50.813 41.777,50.813 41.917,50.674 42.022,50.674 42.181,50.832 42.181,50.938 42.041,51.077 42.041,51.183 42.2,51.341 42.305,51.341 42.445,51.202 42.55,51.202 42.709,51.36 42.709,51.466 42.569,51.605 42.569,51.711 42.727,51.869 42.833,51.869 42.972,51.729 43.078,51.729 43.236,51.888 43.236,51.993 42.743,52.486 42.743,52.592 42.902,52.75 43.007,52.75 43.5,52.257 43.606,52.257 43.764,52.416 43.764,52.521 43.66,52.626 43.66,52.815 43.66,54.225 43.66,54.346 43.585,54.421 43.153,54.421 43.079,54.495 43.079,54.719 43.153,54.794 43.906,54.794 43.981,54.868 43.981,55.092 43.906,55.167 43.153,55.167 43.079,55.242 43.079,55.466 43.153,55.54 43.906,55.54 43.981,55.615 43.981,55.839 43.906,55.913 43.153,55.913 43.079,55.988 43.079,56.212 43.153,56.287 43.906,56.287 43.981,56.361 43.981,56.585 43.906,56.66 43.153,56.66 43.079,56.734 43.079,56.958 43.153,57.033 43.585,57.033 43.66,57.108 43.66,57.54 39.74,61.46 39.74,63.668 39.368,64.04 39.151,64.04 38.94,64.251 38.94,64.468 38.14,65.268 38.14,66.868 37.849,67.16 37.632,67.16 37.34,67.451 37.34,67.668 37.049,67.96 36.751,67.96 36.46,67.668 36.46,67.451 36.161,67.152 35.671,67.152 35.319,66.8 v1(35.3,66.8)
  S8 (SIG) w0.1: 51.9,55.065 54.063,55.065 54.543,55.545 54.733,55.545 55.038,55.85 55.038,56.04 55.343,56.345 55.633,56.345 55.929,56.049 56.234,56.049 v1(56.288,55.995)
  S8 (SIG) w0.119: v1(35.3,51.35) 35.74,51.79 36.249,51.79 36.54,52.082 36.54,52.299 36.751,52.51 37.049,52.51 37.26,52.299 37.26,52.082 37.551,51.79 39.7,51.79 39.726,51.816 39.768,51.859 39.768,51.964 39.711,52.022 39.711,52.127 39.869,52.286 39.975,52.286 40.927,51.333 41.033,51.333 41.191,51.491 41.191,51.597 40.276,52.512 40.276,52.617 40.434,52.776 40.54,52.776 41.126,52.19 41.231,52.19 41.39,52.348 41.39,52.454 40.929,52.914 40.929,53.02 40.96,53.05 41,53.05 41.275,53.05 41.335,53.05 41.409,53.125 41.409,53.523 41.484,53.598 41.708,53.598 41.782,53.523 41.782,52.584 41.857,52.51 42.081,52.51 42.156,52.584 42.156,53.316 42.23,53.39 42.454,53.39 42.529,53.316 42.529,52.584 42.603,52.51 42.827,52.51 42.902,52.584 42.902,53.316 42.977,53.39 43.201,53.39 43.275,53.316 43.275,53.125 43.35,53.05 43.68,53.05 44.103,53.472 44.145,53.515 44.145,53.62 43.645,54.12 43.645,54.226 43.803,54.384 43.908,54.384 44.467,53.826 44.572,53.826 44.731,53.984 44.731,54.09 44.172,54.648 44.172,54.754 44.331,54.912 44.436,54.912 45.025,54.323 45.131,54.323 45.289,54.481 45.289,54.587 45.165,54.711 45.165,54.817 45.323,54.975 45.429,54.975 45.525,54.879 45.63,54.879 45.789,55.037 45.789,55.143 45.736,55.195 45.736,55.301 45.894,55.459 46,55.459 46.05,55.409 46.156,55.409 46.314,55.567 46.314,55.673 46.264,55.723 46.264,55.829 46.422,55.987 46.528,55.987 46.652,55.863 46.757,55.863 46.916,56.021 46.916,56.127 46.792,56.251 46.792,56.356 46.95,56.515 47.056,56.515 47.5,56.071 47.605,56.071 47.763,56.229 47.763,56.335 47.417,56.681 47.417,56.787 47.602,56.972 47.914,57.284 49.401,57.284 49.611,57.073 49.611,56.203 49.39,55.982 49.39,55.276 49.601,55.065 50,55.065 50.06,55.065 50.134,55.14 50.134,55.466 50.209,55.54 50.433,55.54 50.507,55.466 50.507,53.017 50.582,52.943 50.806,52.943 50.881,53.017 50.881,56.917 50.955,56.991 51.179,56.991 51.254,56.917 51.254,53.017 51.328,52.943 51.552,52.943 51.627,53.017 51.627,54.991 51.702,55.065 51.9,55.065
  S10 (SIG) w0.18: 27.2,73.4 31.475,73.4 34.09,70.785 34.09,70.006 34.78,69.316 34.78,68.085 34.89,67.975 34.89,67.21 v1(35.3,66.8)
DDR_ZQ_1: R700.2 U700.L8 | length 1.7
  S1 (SIG) w0.3: v1(34.5,63.6) U700.L8@34.9,63.2
  S10 (SIG) w0.3: R700.2@34.45,64.7 34.481,64.669 34.481,63.619 v1(34.5,63.6)
DDR_ZQ_2: R701.2 U701.L8 | length 1.3
  S1 (SIG) w0.3: v1(34.5,48.15) U701.L8@34.9,47.75
  S10 (SIG) w0.3: v1(34.5,48.15) 34.519,48.131 34.519,47.506 R701.2@34.55,47.475
DIFF34.L1_34_N: J2.23 U300.T10 | length 0.6
  S1 (SIG) w0.11: v1(60.288,52.795) U300.T10@60.688,53.195
DIFF34.L1_34_P: J2.21 U300.T11 | length 0.6
  S1 (SIG) w0.11: v1(61.094,52.776) U300.T11@61.494,53.176
DIFF34.L2_34_N: J2.29 U300.U12 | length 0.6
  S1 (SIG) w0.11: U300.U12@62.288,52.395 v1(62.688,51.995)
DIFF34.L2_34_P: J2.27 U300.T12 | length 0.6
  S1 (SIG) w0.11: U300.T12@62.288,53.195 v1(62.688,52.795)
DIFF34.L4_34_N: J2.35 U300.W13 | length 1.8
  S1 (SIG) w0.11: U300.W13@63.088,50.795 63.488,50.395 63.488,49.135
DIFF34.L4_34_P: J2.33 U300.V12 | length 0.6
  S1 (SIG) w0.11: U300.V12@62.288,51.595 v1(62.688,51.195)
DIFF34.L5_34_N: J2.41 U300.T15 | length 0.6
  S1 (SIG) w0.11: U300.T15@64.688,53.195 v1(65.088,52.795)
DIFF34.L5_34_P: J2.39 U300.T14 | length 0.6
  S1 (SIG) w0.11: U300.T14@63.888,53.195 v1(64.288,52.795)
DIFF34.L6_34_N: J2.47 U300.R14 | length 0.6
  S1 (SIG) w0.11: U300.R14@63.888,53.995 v1(64.288,53.595)
DIFF34.L6_34_P: J2.45 U300.P14 | length 0.6
  S1 (SIG) w0.11: U300.P14@63.888,54.795 v1(64.288,54.395)
DIFF34.L7_34_N: J2.53 U300.Y17 | length 0.9
  S1 (SIG) w0.11: 66.288,49.135 U300.Y17@66.288,49.995
DIFF34.L7_34_P: J2.51 U300.Y16 | length 0.9
  S1 (SIG) w0.11: 65.488,49.135 U300.Y16@65.488,49.995
DIFF34.L8_34_N: J2.59 U300.Y14 | length 0.9
  S1 (SIG) w0.11: 63.888,49.135 U300.Y14@63.888,49.995
DIFF34.L8_34_P: J2.57 U300.W14 | length 1.8
  S1 (SIG) w0.11: U300.W14@63.888,50.795 64.288,50.395 64.288,49.135
DIFF34.L9_34_N: J2.65 U300.U17 | length 0.6
  S1 (SIG) w0.11: U300.U17@66.288,52.395 v1(66.688,51.995)
DIFF34.L9_34_P: J2.63 U300.T16 | length 0.6
  S1 (SIG) w0.11: U300.T16@65.488,53.195 v1(65.888,52.795)
DIFF34.L10_34_N: J2.69 U300.W15 | length 1.8
  S1 (SIG) w0.11: U300.W15@64.688,50.795 65.088,50.395 65.088,49.135
DIFF34.L10_34_P: J2.71 U300.V15 | length 0.6
  S1 (SIG) w0.11: U300.V15@64.688,51.595 v1(65.088,51.195)
DN_LD_A: D400.1 R404.1 | length 1.9
  S1 (SIG) w0.11: D400.1@47.95,25.3 R404.1@49.837,25.3
DN_LD_K: D400.2 Q400.3 | length 2.6
  S1 (SIG) w0.11: D400.2@46.65,25.3 46.675,25.275 Q400.3@46.675,22.745
DONE_0: Q400.1 R405.1 U300.R11 | length 71
  S1 (SIG) w0.11: v4(44.2,18.425) 45.6,18.425 R405.1@45.625,18.4 45.725,18.5 Q400.1@45.725,20.275 ; v1(61.088,53.595) U300.R11@61.488,53.995
  S3 (SIG) w0.1: v4(44.2,18.425) 44.2,18.56 43.95,18.81 43.95,26.3 41.313,28.937 33.838,28.937 31.2,31.575 31.2,40.375 35,44.175 45.1,44.175 49.8,48.875 50.125,48.875 54.475,53.225 60.718,53.225 v1(61.088,53.595)
EF_EN: R203.2 U201.2
EF_ILIM: R205.2 U201.10
EF_SS: C206.2 U201.1
eMMC_RST: R906.1 R907.2 U900.K5 | length 15
  S1 (SIG) w0.11: U900.K5@70.746,86.85 70.746,86.888 71.196,87.338 v1(71.196,87.4)
  S10 (SIG) w0.11: R907.2@61.4,90.916 61.675,90.916 62.634,91.875 64.825,91.875 R906.1@65.7,92.75 68.4,92.75 69.025,92.125 69.025,90.55 71.196,88.379 v1(71.196,87.4)
eMMC_VDDI: C910.2 C911.2 U900.C2 | length 5.6
  S1 (SIG) w0.11: U900.C2@72.246,83.35 72.746,83.85 72.784,83.85 73.359,84.425 v1(73.4,84.425)
  S10 (SIG) w0.11: v1(73.4,84.425) 73.898,84.923 74.173,84.923 74.616,85.366 74.616,85.777 C911.2@75.036,86.197 75.033,86.2 C910.2@73.6,86.2
  other v1: 73.35,85.25 73.9,85.25 74.647,85.252
ETH_CLKOUT: R1121.1 U1100.35 | length 2.8
  S1 (SIG) w0.11: U1100.35@106.825,82.925 109.375,82.925 v1(109.525,82.775)
ETH_COUT: R1119.2 X1100.3 | length 1.4
  S10 (SIG) w0.11: R1119.2@112.65,85.625 112.75,85.525 X1100.3@113.975,85.525
ETH_LED0: R1115.2 R1118.2 U1100.32
ETH_LED1: R1120.2 U1100.33
ETH_LED2: R1116.2 R1122.2 U1100.34
ETH_LED_GRK: J1100.13 R1118.1
ETH_LED_YLK: J1100.12 R1122.1
ETH_MDC: U300.C11 U1100.13 | length 50.3
  S1 (SIG) w0.11: U300.C11@61.488,63.595 v1(61.888,63.995) ; v1(99.8,84.95) 100.328,84.95 101.153,84.125 U1100.13@101.975,84.125
  S8 (SIG) w0.1: v1(61.888,63.995) 62.138,64.245 62.138,65.388 69.35,72.6 73.205,72.6 85.555,84.95 v1(99.8,84.95)
ETH_MDI0_N: J1100.3 U1100.2 | length 9.3
  S1 (SIG) w0.1: U1100.2@105.8,85.55 105.8,85.805 105.887,85.892 105.887,87.093 108.753,89.959 108.753,91.66 108.479,91.933 108.193,91.933 107.505,91.245 J1100.3@107.505,90.91
ETH_MDI0_P: J1100.2 U1100.1 | length 9.4
  S1 (SIG) w0.1: U1100.1@106.2,85.55 106.2,85.805 106.114,85.892 106.114,86.999 108.98,89.865 108.98,91.754 108.55,92.183 108.55,93.225 J1100.2@108.775,93.45
ETH_MDI1_N: J1100.7 U1100.5 | length 15.4
  S1 (SIG) w0.1: J1100.7@102.425,90.91 102.425,93.85 103.05,94.475 104.525,94.475 104.72,94.28 104.72,92.605 105.99,91.335 105.99,89.122 104.687,87.818 104.687,85.892 104.6,85.805 U1100.5@104.6,85.55
ETH_MDI1_P: J1100.4 U1100.4 | length 15.2
  S1 (SIG) w0.1: U1100.4@105,85.55 105,85.805 104.914,85.892 104.914,87.724 106.217,89.028 106.217,91.429 106.165,91.48 106.13,91.516 105.953,91.692 105.953,91.775 106.305,92.127 106.305,92.197 106.199,92.303 106.128,92.303 105.77,91.946 105.7,91.946 105.594,92.052 105.594,92.123 105.818,92.347 105.818,92.418 105.712,92.524 105.641,92.524 105.417,92.299 105.346,92.299 105.24,92.405 105.24,92.476 105.464,92.7 105.464,92.771 105.358,92.877 105.288,92.877 105.088,92.678 105.006,92.678 104.947,92.737 104.947,93.284 104.947,94.297 105.285,94.635 106.407,94.635 106.465,94.576 106.465,93.68 J1100.4@106.235,93.45
ETH_MDI2_N: J1100.6 U1100.7 | length 8.1
  S1 (SIG) w0.1: J1100.6@103.695,93.45 103.759,93.386 103.759,92.033 103.634,91.908 103.634,88.827 103.887,88.575 103.887,85.892 103.8,85.805 U1100.7@103.8,85.55
ETH_MDI2_P: J1100.5 U1100.6 | length 7.9
  S1 (SIG) w0.1: U1100.6@104.2,85.55 104.2,85.805 104.114,85.892 104.114,88.669 103.861,88.921 103.861,91.814 103.92,91.872 104.003,91.872 J1100.5@104.965,90.91
ETH_MDI3_N: J1100.9 U1100.10 | length 8.6
  S1 (SIG) w0.1: J1100.9@99.885,90.91 100.878,91.903 100.961,91.903 101.173,91.69 101.173,89.443 102.687,87.93 102.687,85.892 102.6,85.805 U1100.10@102.6,85.55
ETH_MDI3_P: J1100.8 U1100.9 | length 8.9
  S1 (SIG) w0.1: J1100.8@101.155,93.45 100.954,93.249 100.954,92.188 101.012,92.13 101.055,92.13 101.4,91.784 101.4,89.537 102.914,88.024 102.914,85.892 103,85.805 U1100.9@103,85.55